# EAGLE board Sunface_v2 (EAGLE 8.2.2)
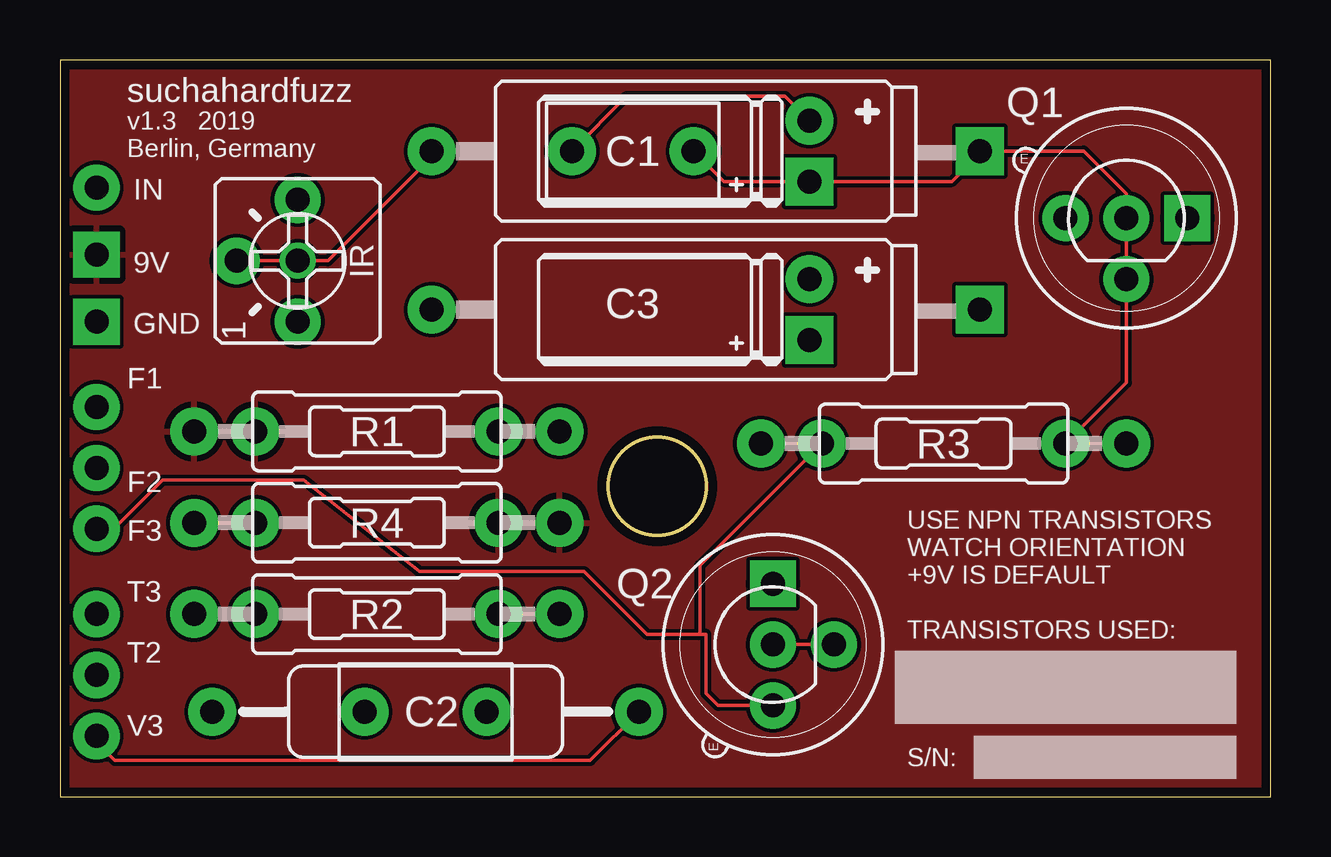
[diagram p0: board, top side]
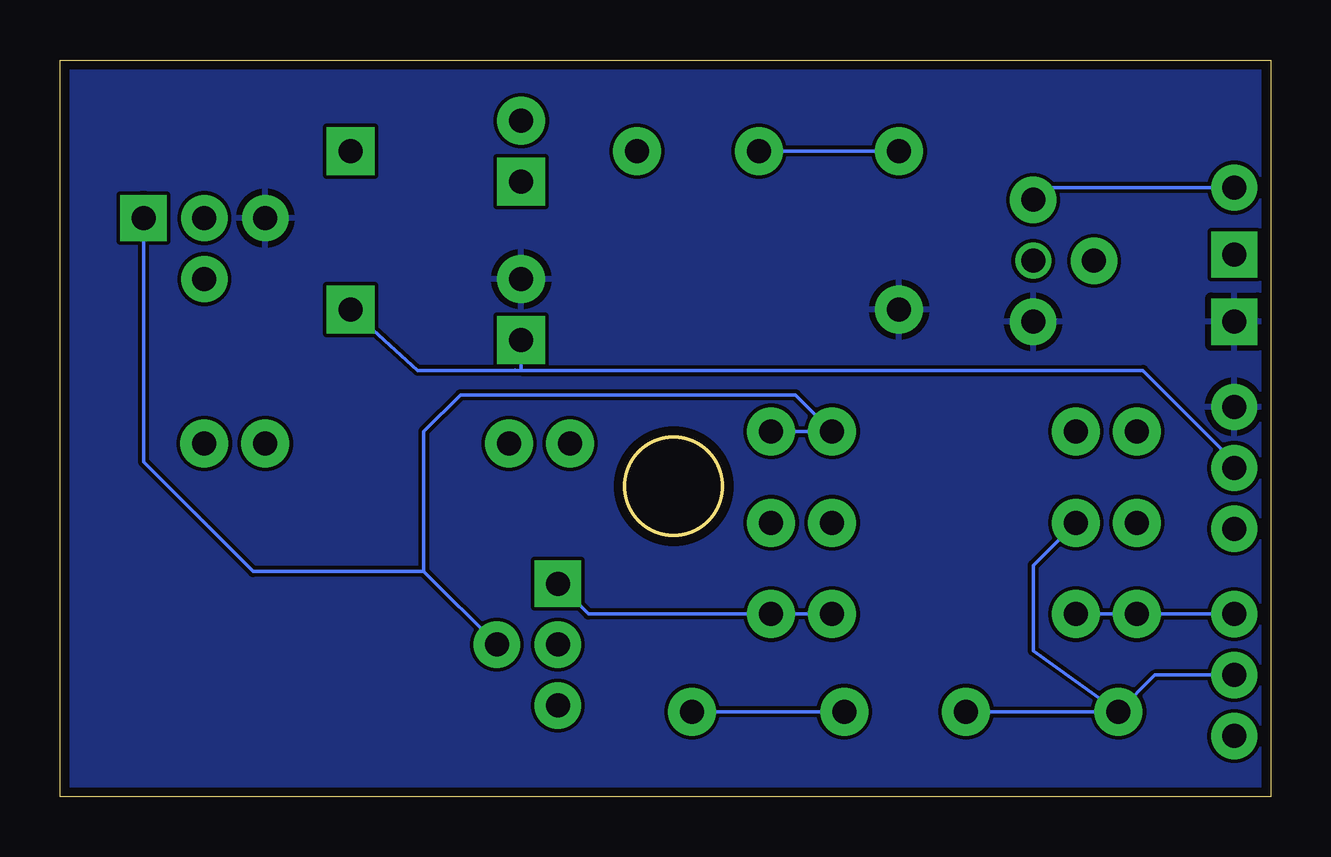
[diagram p1: board, bottom side, seen from below]

Size 50.47 x 30.72 mm. Coordinates in mm from the lower left corner, seen from the top.
Outline: 0,0 50.47,0 50.47,30.72 0,30.72 0,0
Outline: circle at 24.89,12.95 radius 2.03
Copper layers (1*16): Top 0.035mm / dielectric 1.5mm / Bottom 0.035mm
Design rules "default *": minimum track width 6mil, minimum drill 0.35mm, track to track 6mil, track to pad 6mil, pad to pad 6mil, via to via 6mil, smd to smd 6mil, copper to edge 15mil, drill to drill 6mil, minimum pad ring 10mil, minimum via ring 8mil, stop-mask expansion 4mil, vias tented up to drill 0mil, thermal gap 10mil

## Footprints (pad centres in the part's own frame; a part is rotated, then mirrored left to right if it is on the bottom)
050.AXIAL = drill 1 pad 2 square: + -12.7,0 | drill 1 pad 2: - 10.16,0
050.FLAT = drill 1 pad 2 square: + -5.08,1.27 | drill 1 pad 2: - -5.08,-1.27
BOX_MED = drill 1 pad 2: 1 -2.54,0; 2 2.54,0
AXIAL = drill 1 pad 2: 1 -8.89,0; 2 8.89,0
PAD4 = drill 1 pad 1.93 square: P$1 0,0
TRIM1 = drill 1 pad 1.93: 1 -2.54,0; 2 0,2.54; 3 2.54,0
TO-5 = drill 1 pad 1.93: 1 -2.54,0; 2 0,-2.54; 3 2.54,0
TO92 = drill 1 pad 1.93 square: 1 -2.54,0 | drill 1 pad 1.93: 2 0,0; 3 2.54,0
0.4" = drill 1 pad 2: 1 -5.08,0; 2 5.08,0
0.6" = drill 1 pad 2: 1 -7.62,0; 2 7.62,0
PAD2 = drill 1 pad 1.93: P$1 0,0

## Placement (x,y rotation side)
C1  1uF  [050.AXIAL]  25.65,26.92 180 top
C1_  [050.FLAT]  26.16,26.92 180 top
C1__  [BOX_MED]  23.88,26.92 0 top
C2  0.01uF  [AXIAL]  15.24,3.56 0 top
C2_  [BOX_MED]  15.24,3.56 0 top
C3  22uF  [050.AXIAL]  25.65,20.32 180 top
C5  [050.FLAT]  26.16,20.32 180 top
GND  PADS.SQR_NL  [PAD4]  1.52,19.81 0 top
IR  50k  [TRIM1]  9.91,22.35 90 top
Q1  GE NPN  [TO-5]  44.45,24.13 0 top
Q2  GE NPN  [TO-5]  29.72,6.35 90 top
Q3  2N5088  [TO92]  44.45,24.13 180 top
Q4  2N5088  [TO92]  29.72,6.35 270 top
R1  33k  [0.4"]  13.21,15.24 180 top
R2  2.2k  [0.4"]  13.21,7.62 180 top
R3  100k  [0.4"]  36.83,14.73 0 top
R4  470R  [0.4"]  13.21,11.43 0 top
R5  [0.6"]  13.21,15.24 180 top
R6  [0.6"]  13.21,7.62 180 top
R7  [0.6"]  36.83,14.73 0 top
R8  [0.6"]  13.21,11.43 0 top
U$1  PADS.RND_NL  [PAD2]  1.52,25.4 0 top
U$2  PADS.RND_NL  [PAD2]  1.52,2.54 0 top
U$3  PADS.RND_NL  [PAD2]  1.52,7.62 0 top
U$4  PADS.RND_NL  [PAD2]  1.52,5.08 0 top
U$5  PADS.RND_NL  [PAD2]  1.52,11.18 0 top
U$6  PADS.RND_NL  [PAD2]  1.52,13.72 0 top
U$7  PADS.RND_NL  [PAD2]  1.52,16.26 0 top
U$8  PADS.SQR_NL  [PAD4]  1.52,22.61 0 top

## Library data of the parts
C1 C1_ C3 C5 = caps-elec
C1__ C2 C2_ = capacitors-film
GND U$1-U$8 = supply pins
IR = potentiometers
Q1 Q2 = transistors-GERM
Q3 Q4 = transistors-BJT
R1-R8 = resistors

## Nets
+9V: R1.2 R4.2 R5.2 R8.2 U$8.P$1
GND: C3.- C5.- GND.P$1 IR.1 Q1.1 Q3.3 U$7.P$1
N$1: C1.- C1_.- C1__.1 IR.2
N$2: C1.+ C1_.+ C1__.2 Q1.2 Q3.2 R3.2 R7.2
N$3: Q1.3 Q2.2 Q3.1 Q4.2 R1.1 R5.1
N$4: R2.2 R6.2 U$3.P$1
N$5: Q2.3 Q4.1 R2.1 R6.1
N$6: Q2.1 Q4.3 R3.1 R7.1 U$5.P$1
N$7: C3.+ C5.+ U$6.P$1
N$8: IR.3 U$1.P$1
N$9: C2.1 C2_.1 R4.1 R8.1 U$4.P$1
OUT: C2.2 C2_.2 U$2.P$1

## Tracks (layer width: path | path; a pad name or v marks a point on that pad's centre or on a via)
+9V
  pour Top: 0,30.73 0,0 50.8,0 50.8,30.73
GND
  pour Bottom: 0,0 50.8,0 50.8,30.99 0,30.99
N$1  (via drill 0.35, 1)
  Top 0.152: v15.49,26.67 11.18,22.35 v9.91,22.35 IR.2 | C1__.1 23.62,29.21 30.23,29.21 C1_.-
  Bottom 0.152: v15.49,26.67 C1.- C1__.1
N$2  (via drill 0.35)
  Top 0.152: C1__.2 27.69,25.65 C1_.+ 37.18,25.65 v38.45,26.92 42.67,26.92 44.45,25.15 Q3.2 Q1.2 44.45,17.27 R3.2 R7.2
  Bottom 0.152: v38.45,26.92 C1.+ | C1__.2 25.91,27.43
N$3
  Top 0.152: Q4.2 Q2.2
  Bottom 0.152: 35.31,9.4 Q2.2 | 35.31,9.4 42.42,9.4 46.99,13.97 Q3.1 | 35.31,9.4 35.31,15.24 33.78,16.76 19.81,16.76 R1.1 R5.1
N$4
  Bottom 0.152: U$3.P$1 R2.2 R6.2
N$5
  Top 0.152: R2.1 R6.1
  Bottom 0.152: Q4.1 28.45,7.62 R2.1
N$6
  Top 0.152: Q4.3 27.43,3.81 26.92,4.32 26.92,6.78 26.67,6.78 | 26.67,6.78 24.46,6.78 21.84,9.4 14.99,9.4 10.16,13.21 4.28,13.21 2.24,11.18 U$5.P$1 | 26.67,6.78 26.67,9.65 R3.1 R7.1
N$7
  Bottom 0.152: C3.+ 35.56,17.78 31.52,17.78 | U$6.P$1 1.52,13.97 5.33,17.78 31.23,17.78 | 31.23,17.78 31.52,17.78 | 31.5,17.8 31.52,17.78 | C5.+ 31.24,17.79 31.23,17.78
N$8
  Bottom 0.152: U$1.P$1 9.4,25.4 IR.3
N$9
  Top 0.152: 6.38,3.87 C2.1 | R8.1 R4.1
  Bottom 0.152: U$4.P$1 4.83,5.08 C2.1 | C2.1 9.91,6.1 9.91,9.65 R4.1 | C2_.1 C2.1
OUT
  Top 0.152: C2.2 22.1,1.52 2.29,1.52 1.52,2.29 U$2.P$1
  Bottom 0.152: C2_.2 C2.2

## Text on the board
tNames: suchahardfuzz | v1.3 2019 / Berlin, Germany | IN | 9V | GND | F1 | F2 | F3 | T3 | USE NPN TRANSISTORS / WATCH ORIENTATION / +9V IS DEFAULT / / TRANSISTORS USED: | T2 | V3 | S/N: